# EAGLE board BackBoard (EAGLE 9.6.2)

Size 140 x 35 mm. Coordinates in mm from the lower left corner, seen from the top.
Outline: 122.5,35 arc-180 122.5,0 30,0 30,12 arc90 29.5,12.5 19.5,12.5 arc90 19,12 19,0 17.5,0 arc-180 17.5,35 122.5,35
Copper layers (1*16): Top 0.035mm / dielectric 1.5mm / Bottom 0.035mm
Design rules "default *": minimum track width 6mil, minimum drill 0.5mm, track to track 6mil, track to pad 6mil, pad to pad 6mil, via to via 6mil, smd to smd 6mil, copper to edge 0.2mm, drill to drill 6mil, minimum pad ring 10mil, minimum via ring 8mil, stop-mask expansion 4mil, vias tented up to drill 0mil, thermal gap 10mil
Net classes: 1 wide keepout: clearance 0.508 mm; 2 12V: width 0.254 mm, clearance 0.508 mm
Holes 3.3 mm at 5.5,17.5 134.5,17.5
Holes 6 mm at 46.25,27.75 78.25,27.75 94.25,27.75
Holes 5.2 mm at 14,29.5

## Footprints (pad centres in the part's own frame; a part is rotated, then mirrored left to right if it is on the bottom)
VENT = drill 2: P$1 0,0

## Placement (x,y rotation side)
V1  VENT  [VENT]  20,24 0 top
V2  VENT  [VENT]  24,28 0 top
V3  VENT  [VENT]  28,24 0 top
V4  VENT  [VENT]  32,28 0 top
V5  VENT  [VENT]  36,24 0 top
V6  VENT  [VENT]  112,24 0 top
V7  VENT  [VENT]  116,28 0 top
V8  VENT  [VENT]  120,24 0 top
V9  VENT  [VENT]  124,28 0 top
V10  VENT  [VENT]  128,24 0 top
V11  VENT  [VENT]  48,4 0 top
V12  VENT  [VENT]  120,8 0 top
V13  VENT  [VENT]  40,4 0 top
V14  VENT  [VENT]  44,8 0 top
V15  VENT  [VENT]  116,4 0 top
V16  VENT  [VENT]  124,4 0 top

## Library data of the parts
V1-V16 = VENT

## Text on the board
bPlace: _ | + | MODE / SET | BRIGHTNESS / TIME/DATE SET | 12V DC | + | _ | B13B NIXIE CLOCK
tNames: Design F.LIDOVE v1.0 | JLCJLCJLCJLC